# Altium PCB PCB1.PcbDoc
Units mm, origin at the board's own origin, x right, y up, seen from the top; angles counter-clockwise.
Board outline 93.05 x 86.05 mm, 2 copper layers (Top Layer, Bottom Layer); 22 components, 27 nets, 119 pads, 11 vias.
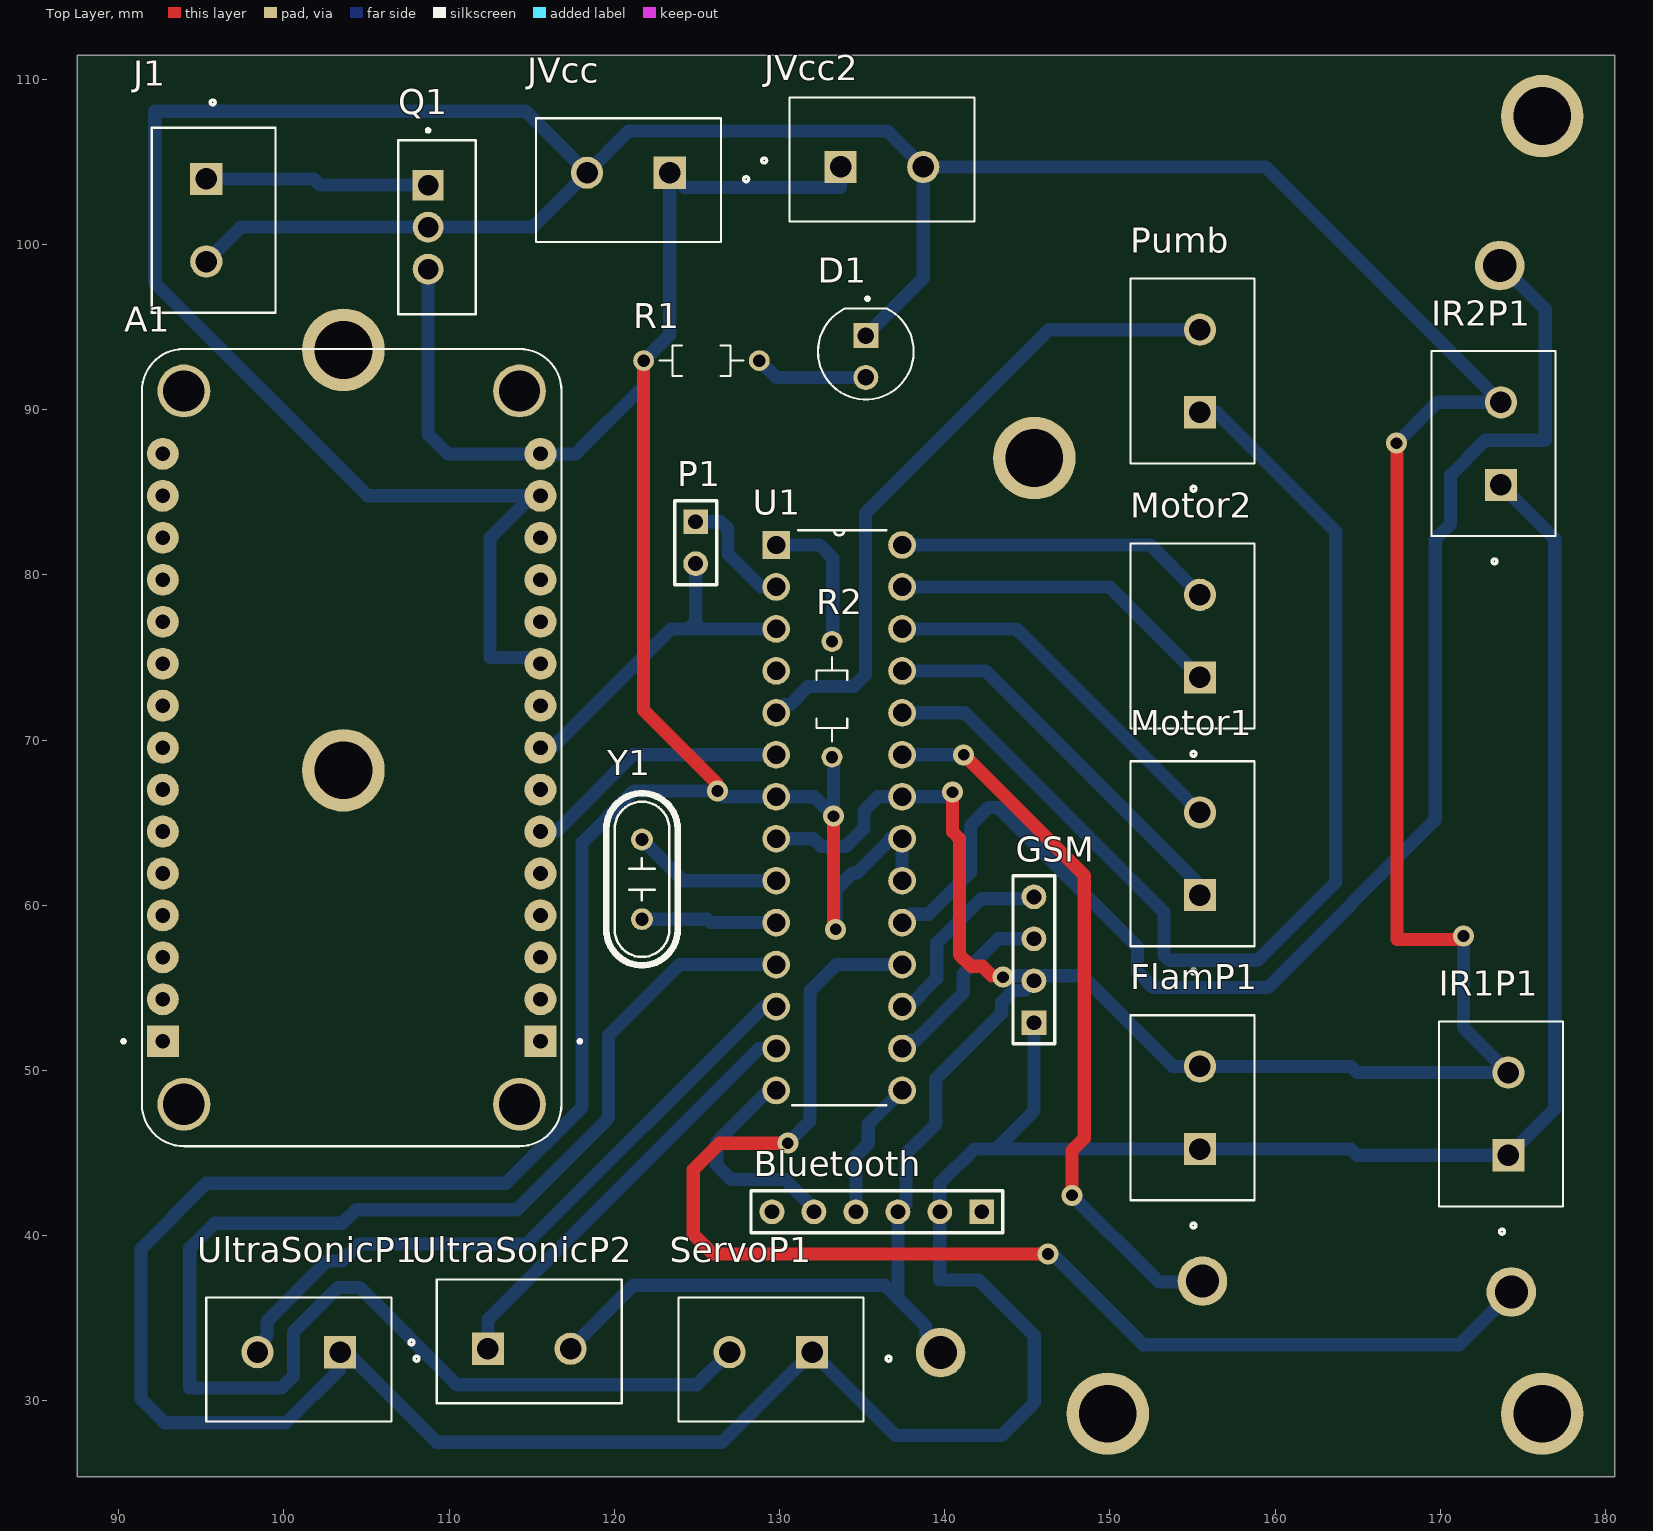
[diagram p0: Top Layer view]
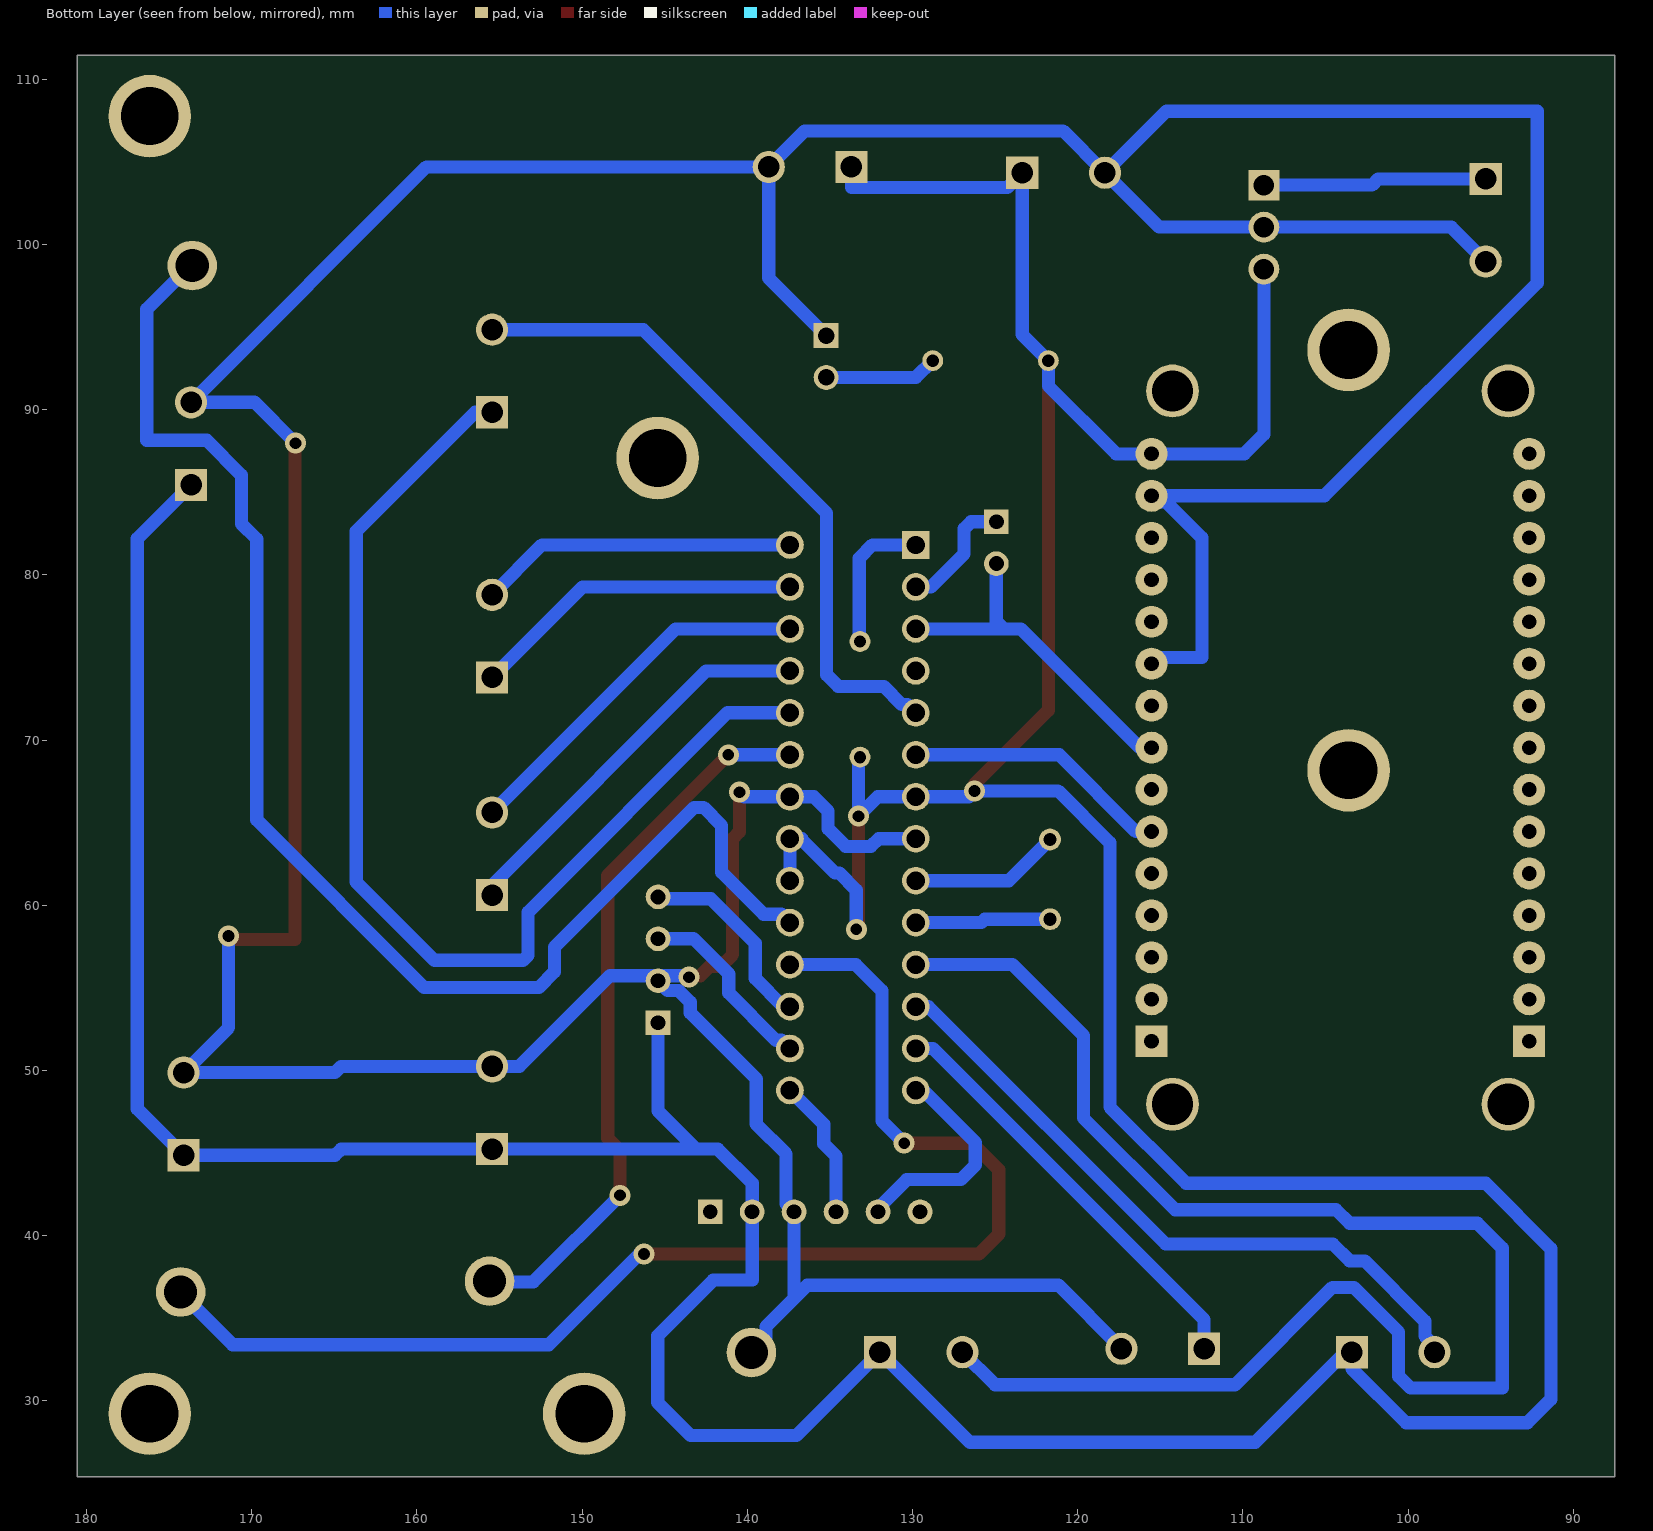
[diagram p1: Bottom Layer view, seen from below]

## Layer stack, top to bottom
Top Solder: solder mask 0.0102, Solder Resist, Dk 3.5
Top Layer: signal copper 0.0356
Dielectric 1: dielectric 0.32, FR-4, Dk 4.8
Bottom Layer: signal copper 0.0356
Bottom Solder: solder mask 0.0102, Solder Resist, Dk 3.5

## Board outline
87.5,25.4 180.55,25.4 180.55,111.45 87.5,111.45

## Design rules (kind name [scope] priority, off if disabled: settings)
Clearance [All] p1: gap=0.8 ignorepadtopadclearanceinfootprint=FALSE
PolygonConnect [All] p1: connectstyle=Relief reliefconductorwidth=0.254 reliefentries=4 polygonreliefangle="90 Angle" airgapwidth=0.254
RoutingVias [All] p1: holewidth=0.711 width=1.27 viastyle="Through Hole" minholewidth=0.711 minwidth=1.27 maxholewidth=0.711 maxwidth=1.27
SolderMaskExpansion [All] p1: expansion=0.102
Width [All] p1: maxlimit=0.8 minlimit=0.8 preferedwidth=0.8
30 further rules are at their usual default settings.

## Components (designator, comment, footprint, x,y, rotation, side; value= is the part's Value field where it differs from the comment)
A1 "113990105" SEEED_113990105 104.1,69.55 r180 top
Bluetooth "Header 6" HDR1X6 142.245,41.45 r180 top
D1 "151054RS03000" LED_151054RS03000 135.225,93.225 r270 top
FlamP1 "" OST_OSTTC020162 155.45,45.25 r90 top
GSM "Header 4" HDR1X4 145.4,52.895 r90 top
IR1P1 "" OST_OSTTC020162 174.125,44.875 r90 top
IR2P1 "" OST_OSTTC020162 173.675,85.45 r90 top
J1 "OSTTC020162" OST_OSTTC020162 95.3,103.975 r270 top
JVcc "OSTTC020162" OST_OSTTC020162 123.35,104.35 r180 top
JVcc2 "OSTTC020162" OST_OSTTC020162 133.7,104.7 r0 top
Motor1 "" OST_OSTTC020162 155.45,60.625 r90 top
Motor2 "" OST_OSTTC020162 155.45,73.8 r90 top
P1 "Header 2" HDR1X2 124.925,83.225 r270 top
Pumb "" OST_OSTTC020162 155.45,89.85 r90 top
Q1 "LM7805CT/NOPB" TO254P1054X470X2600-3 108.725,103.6 r270 top
R1 "1623928-8" RESAD700W45L350D185 125.275,92.975 r0 top
R2 "1623928-8" RESAD700W45L350D185 133.175,72.475 r90 top
ServoP1 "" OST_OSTTC020162 131.975,32.95 r180 top
U1 "ATMEGA328P-PU" DIP254P762X457-28 137.42,48.795 r0 top
UltraSonicP1 "" OST_OSTTC020162 103.4,32.95 r180 top
UltraSonicP2 "" OST_OSTTC020162 112.35,33.157 r0 top
Y1 "XT9S20ANA16M" XTAL_XT9S20ANA16M 121.675,61.575 r90 top

## Footprints (in the part's own frame and the unit in brackets; to place one, negate y for a bottom-side part, rotate by r counter-clockwise, add the part's x,y. Pads: shape width x height; smd on the part's side, far side on the other; paste and mask are expansions set on the pad)
DIP254P762X457-28 [mil]
  rect 66x66 hole 44: 1(-300,1300)
  round 66 hole 44: 2(-300,1200) 3(-300,1100) 4(-300,1000) 5(-300,900) 6(-300,800) 7(-300,700) 8(-300,600) 9(-300,500) 10(-300,400) 11(-300,300) 12(-300,200) 13(-300,100) 14(-300,0) 15(0,0) 16(0,100) 17(0,200) 18(0,300) 19(0,400) 20(0,500) 21(0,600) 22(0,700) 23(0,800) 24(0,900) 25(0,1000) 26(0,1100) 27(0,1200) 28(0,1300)
  silkscreen extent -262,-35 -38,1335, body extent -366,-23 34,1342, height 180
HDR1X2 [mm] "Connector; Header; 2 Position"
  rect 1.5x1.5 hole 0.9: 1(0,0)
  round 1.5 hole 0.9: 2(2.54,0)
  silkscreen extent -1.27,-1.27 3.81,1.27
HDR1X4 [mm] "Connector; Header; 4 Position"
  rect 1.5x1.5 hole 0.9: 1(0,0)
  round 1.5 hole 0.9: 2(2.54,0) 3(5.08,0) 4(7.62,0)
  silkscreen extent -1.27,-1.27 8.89,1.27
HDR1X6 [mm] "Connector; Header; 6 Position"
  rect 1.5x1.5 hole 0.9: 1(0,0)
  round 1.5 hole 0.9: 2(2.54,0) 3(5.08,0) 4(7.62,0) 5(10.16,0) 6(12.7,0)
  silkscreen extent -1.27,-1.27 13.97,1.27
LED_151054RS03000 [mm]
  round 1.508 hole 1: A(1.27,0)
  rect 1.508x1.508 hole 1: C(-1.27,0)
  silkscreen extent -3.6,-2.9 2.6,2.9, body extent -2.9,-2.9 2.51,2.9, height 12.1
OST_OSTTC020162 [mm]
  rect 1.95x1.95 hole 1.3: 1(0,0)
  round 1.95 hole 1.3: 2(5,0)
  silkscreen extent -4.78,-3.3 8.1,4.2, body extent -3.81,-4.68 8.89,4.32, height 16.47
RESAD700W45L350D185 [mm]
  round 1.258 hole 0.75: 1(-3.5,0) 2(3.5,0)
  silkscreen extent -2.55,-0.92 2.55,0.93, body extent -4.19,-0.76 3.93,1.02, height 1.79
SEEED_113990105 [mil]
  rect 75.98x75.98 hole 35: J1_1(-450,700) J2_1(450,700)
  round 75.98 hole 35: J1_2(-450,600) J1_3(-450,500) J1_4(-450,400) J1_5(-450,300) J1_6(-450,200) J1_7(-450,100) J1_8(-450,0) J1_9(-450,-100) J1_10(-450,-200) J1_11(-450,-300) J1_12(-450,-400) J1_13(-450,-500) J1_14(-450,-600) J1_15(-450,-700) J2_2(450,600) J2_3(450,500) J2_4(450,400) J2_5(450,300) J2_6(450,200) J2_7(450,100) J2_8(450,0) J2_9(450,-100) J2_10(450,-200) J2_11(450,-300) J2_12(450,-400) J2_13(450,-500) J2_14(450,-600) J2_15(450,-700)
  round 125.98 hole 98.43 unplated: ""(-400,850) ""(-400,-850) ""(400,850) ""(400,-850)
  silkscreen extent -548,-950 548,950
TO254P1054X470X2600-3 [mm]
  rect 1.86x1.86 hole 1.24: 1(0,0)
  round 1.86 hole 1.24: 2(2.54,0) 3(5.08,0)
  silkscreen extent -3.41,-1.8 7.81,2.9, body extent -2.51,-2.03 7.59,2.41, height 20.73
XTAL_XT9S20ANA16M [mil]
  round 52 hole 32: 1(-95,0) 2(95,0)
  silkscreen extent -205,-85 205,85, body extent -218,-100 218,83, height 138

## Part data
A1: "NodeMCU v2 - Lua based ESP8266 development kit"
Bluetooth: "Header, 6-Pin"
D1: "Red 623nm LED Indication - Discrete 1.9V Radial"
FlamP1 IR1P1 IR2P1 Motor1 Motor2 Pumb ServoP1 UltraSonicP1 UltraSonicP2: library part OSTTC020162, "CONN, TERMINAL BLOCK, 5mm, 2 PIN, .42\"L x.30\"D x .39\"H"
GSM: "Header, 4-Pin"
J1 JVcc JVcc2: "CONN, TERMINAL BLOCK, 5mm, 2 PIN, .42\"L x.30\"D x .39\"H"
P1: "Header, 2-Pin"
Q1: "Standard Regulator Pos 5V 1A 3-Pin(3+Tab) TO-220 Rail"
R1 R2: "CFR16 5% 10K"
U1: "8-bit Microcontroller with In-System Programmable Flash"
Y1: "Microprocessor, Crystal; 16 MHz; + 30 ppm (Typ.) @ 25 degC; 7 pF (Max.); 40 Ohm"

## Free pads (board coordinates)
  round 5 hole 3.5: 2(103.6,68.175) 2(103.6,93.625) 2(145.425,87.075) 2(149.875,29.225) 2(176.175,29.225) 2(176.175,107.775)
  round 3 hole 2: 2(139.75,32.925) 2(155.6,37.25) 2(173.6,98.725) 2(174.3,36.6)

## Via types
v1: diameter 1.27, hole 0.711, Top Layer to Bottom Layer, 11 vias

## Nets (pads, with @x,y where several pads share a name; then routed paths per layer and width w, separated by ;. In a path a pad name is that pad's centre, name@x,y a point inside that pad or via, vN(x,y) a via of type N, cw(c..) or ccw(c..) an arc to the next point about the centre after c; other vN are vias at no path point)
ArdRx: Bluetooth.4 U1.15 | length 8.5
  Bottom Layer w0.8: Bluetooth.4 134.625,44.825 135.375,45.575 135.375,46.75 U1.15
ArdTx: Bluetooth.5 U1.14 | length 13.5
  Bottom Layer w0.8: U1.14 129.345,48.795 126.2,45.65 126.2,44.275 127.075,43.4 130.353,43.4 132.085,41.668 Bluetooth.5
Crys1: U1.9 Y1.2 | length 9.2
  Bottom Layer w0.8: Y1.2 124.168,61.495 U1.9
Crys2: U1.10 Y1.1 | length 8.2
  Bottom Layer w0.8: Y1.1 125.628,59.162 125.835,58.955 U1.10
Echo: U1.13 UltraSonicP2.1 | length 26
  Bottom Layer w0.8: UltraSonicP2.1@112.35,33.2 112.35,34.925 128.76,51.335 U1.13
Flame: pad.2@155.6,37.25 U1.23 | length 43.9
  Top Layer w0.8: v1(141.146,69.115) 148.45,61.811 148.45,45.907 147.7,45.157 v1(147.7,42.45)
  Bottom Layer w0.8: U1.23 v1(141.146,69.115) ; v1(147.7,42.45) 152.95,37.2 pad.2@155.657,37.2
GND: A1.J1_10 A1.J1_14 Bluetooth.3 D1.C FlamP1.2 GSM.2 IR1P1.2 IR2P1.2 J1.2 JVcc2.2 JVcc.2 pad.2@139.75,32.925 Q1.2 U1.8 U1.22 UltraSonicP2.2 | length 339.8
  Top Layer w0.8: v1(140.475,66.85) 140.475,64.452 140.894,64.033 140.894,57.023 141.605,56.312 142.273,56.312 142.85,55.735 ; v1@167.375,88.15 167.375,57.925 171.175,57.925 v1(171.4,58.15)
  Bottom Layer w0.8: J1.2 97.385,101.06 Q1.2 115.06,101.06 JVcc.2 ; A1.J1_10 115.155,75.005 112.475,75.005 112.475,82.257 114.633,84.415 115.155,84.415 A1.J1_14 105.06,84.79 92.175,97.675 92.175,108.075 114.625,108.075 JVcc.2 ; UltraSonicP2.2@117.35,33.2 121.155,37.005 136.37,37.005 137.05,36.325 ; U1.8 132.045,64.035 132.515,63.565 134.035,63.565 135.11,64.64 135.11,65.71 135.975,66.575 U1.22 140.2,66.575 v1(140.475,66.85) ; D1.C 138.7,97.97 JVcc2.2 ; pad.2@139.75,32.925 138.863,33.812 138.863,34.513 137.05,36.325 ; v1@143.75,55.735 148.315,55.735 153.8,50.25 FlamP1.2 164.592,50.25 164.967,49.875 IR1P1.2 171.4,52.6 v1(171.4,58.15) ; GSM.2 144.81,54.845 144.153,54.845 143.45,54.142 143.45,53.485 139.458,49.493 139.458,46.757 137.65,44.949 137.65,41.935 Bluetooth.3 137.165,36.44 137.05,36.325 ; v1(167.35,87.975) 169.825,90.45 IR2P1.2 159.425,104.7 JVcc2.2 ; JVcc.2 120.883,106.883 136.517,106.883 JVcc2.2
  other v1: 143.525,55.65
GSMRx: GSM.4 U1.17 | length 12
  Bottom Layer w0.8: U1.17 137.825,53.875 139.525,55.575 139.525,57.708 142.218,60.401 145.286,60.401 GSM.4
GSMTx: GSM.3 U1.16 | length 11.4
  Bottom Layer w0.8: U1.16 137.922,51.837 138.264,51.837 141.125,54.698 141.125,55.845 143.255,57.975 GSM.3
INT1: U1.4
IR1: pad.2@174.3,36.6 U1.18 | length 80
  Top Layer w0.8: v1(130.5,45.6) 126.375,45.6 124.775,44 124.775,40.1 125.988,38.887 146.237,38.887 v1(146.25,38.9)
  Bottom Layer w0.8: v1(130.5,45.6) 131.851,46.951 131.851,54.84 133.426,56.415 U1.18 ; v1(146.25,38.9) 146.263,38.887 146.538,38.887 152.025,33.4 171.157,33.4 pad.2@174.332,36.575
IR2: pad.2@173.6,98.725 U1.19 | length 86
  Bottom Layer w0.8: U1.19 137.922,59.457 139.011,59.457 141.556,62.001 141.556,64.831 142.65,65.925 143.225,65.925 151.675,57.475 151.675,55.975 152.625,55.025 159.55,55.025 169.7,65.175 169.7,82.178 170.625,83.103 170.625,86.047 172.728,88.15 176.35,88.15 176.35,96.1 pad.2@173.675,98.775
MotorA1: Motor1.1 U1.25 | length 24
  Bottom Layer w0.8: U1.25 142.48,74.195 155.45,61.225 Motor1.1
MotorA2: Motor1.2 U1.26 | length 22.6
  Bottom Layer w0.8: U1.26 144.34,76.735 Motor1.2
MotorB1: Motor2.1 U1.27 | length 20.3
  Bottom Layer w0.8: U1.27 149.975,79.275 Motor2.1
MotorB2: Motor2.2 U1.28 | length 19.3
  Bottom Layer w0.8: U1.28 152.435,81.815 Motor2.2
NetD1_A: D1.A R1.2 | length 6.9
  Bottom Layer w0.8: R1.2 129.795,91.955 D1.A
PIN0: P1.1 U1.2 | length 7.4
  Bottom Layer w0.8: P1.1 126.45,83.225 126.875,82.8 126.875,81.275 128.875,79.275 U1.2
Pumb: Pumb.1 U1.24 | length 68.4
  Bottom Layer w0.8: U1.24 141.201,71.655 153.275,59.581 153.275,56.975 153.575,56.675 158.937,56.675 163.675,61.413 163.675,82.65 156.475,89.85 Pumb.1
PumbPWM: Pumb.2 U1.5 | length 41
  Bottom Layer w0.8: U1.5 130.302,72.157 130.644,72.157 131.737,73.25 134.5,73.25 135.2,73.95 135.2,83.75 146.3,94.85 Pumb.2
Reset: R2.2 U1.1 | length 8.3
  Bottom Layer w0.8: U1.1 132.428,81.815 133.225,81.018 R2.2@133.225,76.475
SendOrd1: A1.J1_8 P1.2 U1.3 | length 21.4
  Bottom Layer w0.8: A1.J1_8 116.25,69.55 123.435,76.735 124.475,76.735 ; P1.2 124.925,77.185 124.475,76.735 ; U1.3 124.475,76.735
SendOrd2: A1.J1_6 U1.6 | length 16.2
  Bottom Layer w0.8: A1.J1_6 116.47,64.47 121.115,69.115 U1.6
Servo: ServoP1.2 U1.11 | length 94
  Bottom Layer w0.8: ServoP1.2 125,30.975 110.475,30.975 104.575,36.875 103.278,36.875 100.575,34.172 100.575,31.5 99.85,30.775 94.3,30.775 94.3,39.25 95.8,40.75 103.537,40.75 104.362,41.575 114.098,41.575 119.65,47.127 119.65,52.125 123.94,56.415 U1.11
Trig: U1.12 UltraSonicP1.2 | length 40.4
  Bottom Layer w0.8: UltraSonicP1.2@98.4,33.35 98.975,33.925 98.975,34.835 102.615,38.475 103.525,38.475 104.55,39.5 114.662,39.5 129.037,53.875 U1.12
VCC: A1.J1_15 Bluetooth.2 FlamP1.1 GSM.1 IR1P1.1 IR2P1.1 JVcc2.1 JVcc.1 Q1.3 R1.1 R2.1 ServoP1.1 U1.7 U1.20 U1.21 UltraSonicP1.1 | length 341.1
  Top Layer w0.8: R1.1 121.775,71.8 126.25,67.325 v1(126.25,66.925) ; v1(133.275,65.4) 133.275,58.675 v1(133.4,58.55)
  Bottom Layer w0.8: Q1.3 108.725,88.525 109.92,87.33 A1.J1_15 117.665,87.33 121.775,91.44 R1.1 123.35,94.55 JVcc.1 124.25,103.45 133.7,103.45 JVcc2.1 ; R2.1 133.275,68.875 v1(133.275,65.4) 132.1,66.575 U1.7 126.6,66.575 v1(126.25,66.925) 121.188,66.925 118.05,63.787 118.05,47.79 113.435,43.175 95.3,43.175 91.35,39.225 91.35,30.1 92.775,28.675 100.125,28.675 103.4,31.95 UltraSonicP1.1 103.4,33.35 109.25,27.5 126.525,27.5 ServoP1.1 137.025,27.9 143.425,27.9 145.425,29.9 145.425,33.95 142.058,37.317 139.705,37.317 Bluetooth.2 139.705,43.18 141.775,45.25 143.1,45.25 ; v1(133.4,58.55) 133.4,60.925 134.44,61.965 134.698,61.965 136.71,63.977 136.71,64.035 U1.21 U1.20 ; GSM.1 145.4,47.55 143.1,45.25 ; IR2P1.1 176.925,82.2 176.925,47.675 IR1P1.1 164.967,44.875 164.592,45.25 FlamP1.1 143.1,45.25
VCCH: J1.1 Q1.1 | length 13.6
  Bottom Layer w0.8: J1.1 101.803,103.975 102.178,103.6 Q1.1
pads on no net: A1. A1.J1_1 A1.J1_2 A1.J1_3 A1.J1_4 A1.J1_5 A1.J1_7 A1.J1_9 A1.J1_11 A1.J1_12 A1.J1_13 A1.J2_1 A1.J2_2 A1.J2_3 A1.J2_4 A1.J2_5 A1.J2_6 A1.J2_7 A1.J2_8 A1.J2_9 A1.J2_10 A1.J2_11 A1.J2_12 A1.J2_13 A1.J2_14 A1.J2_15 Bluetooth.1 Bluetooth.6